# Altium PCB УШЯИ 758727.205-2.PcbDoc (part 1 of 3)
Units mm, origin at the board's own origin, x right, y up, seen from the top; angles counter-clockwise.
Board outline 230 x 150 mm, 2 copper layers (Top Layer, Bottom Layer), stack 1.57 mm thick; 340 components, 190 nets, 1058 pads, 246 vias.
Unrouted connection lines stored in the file: 2.
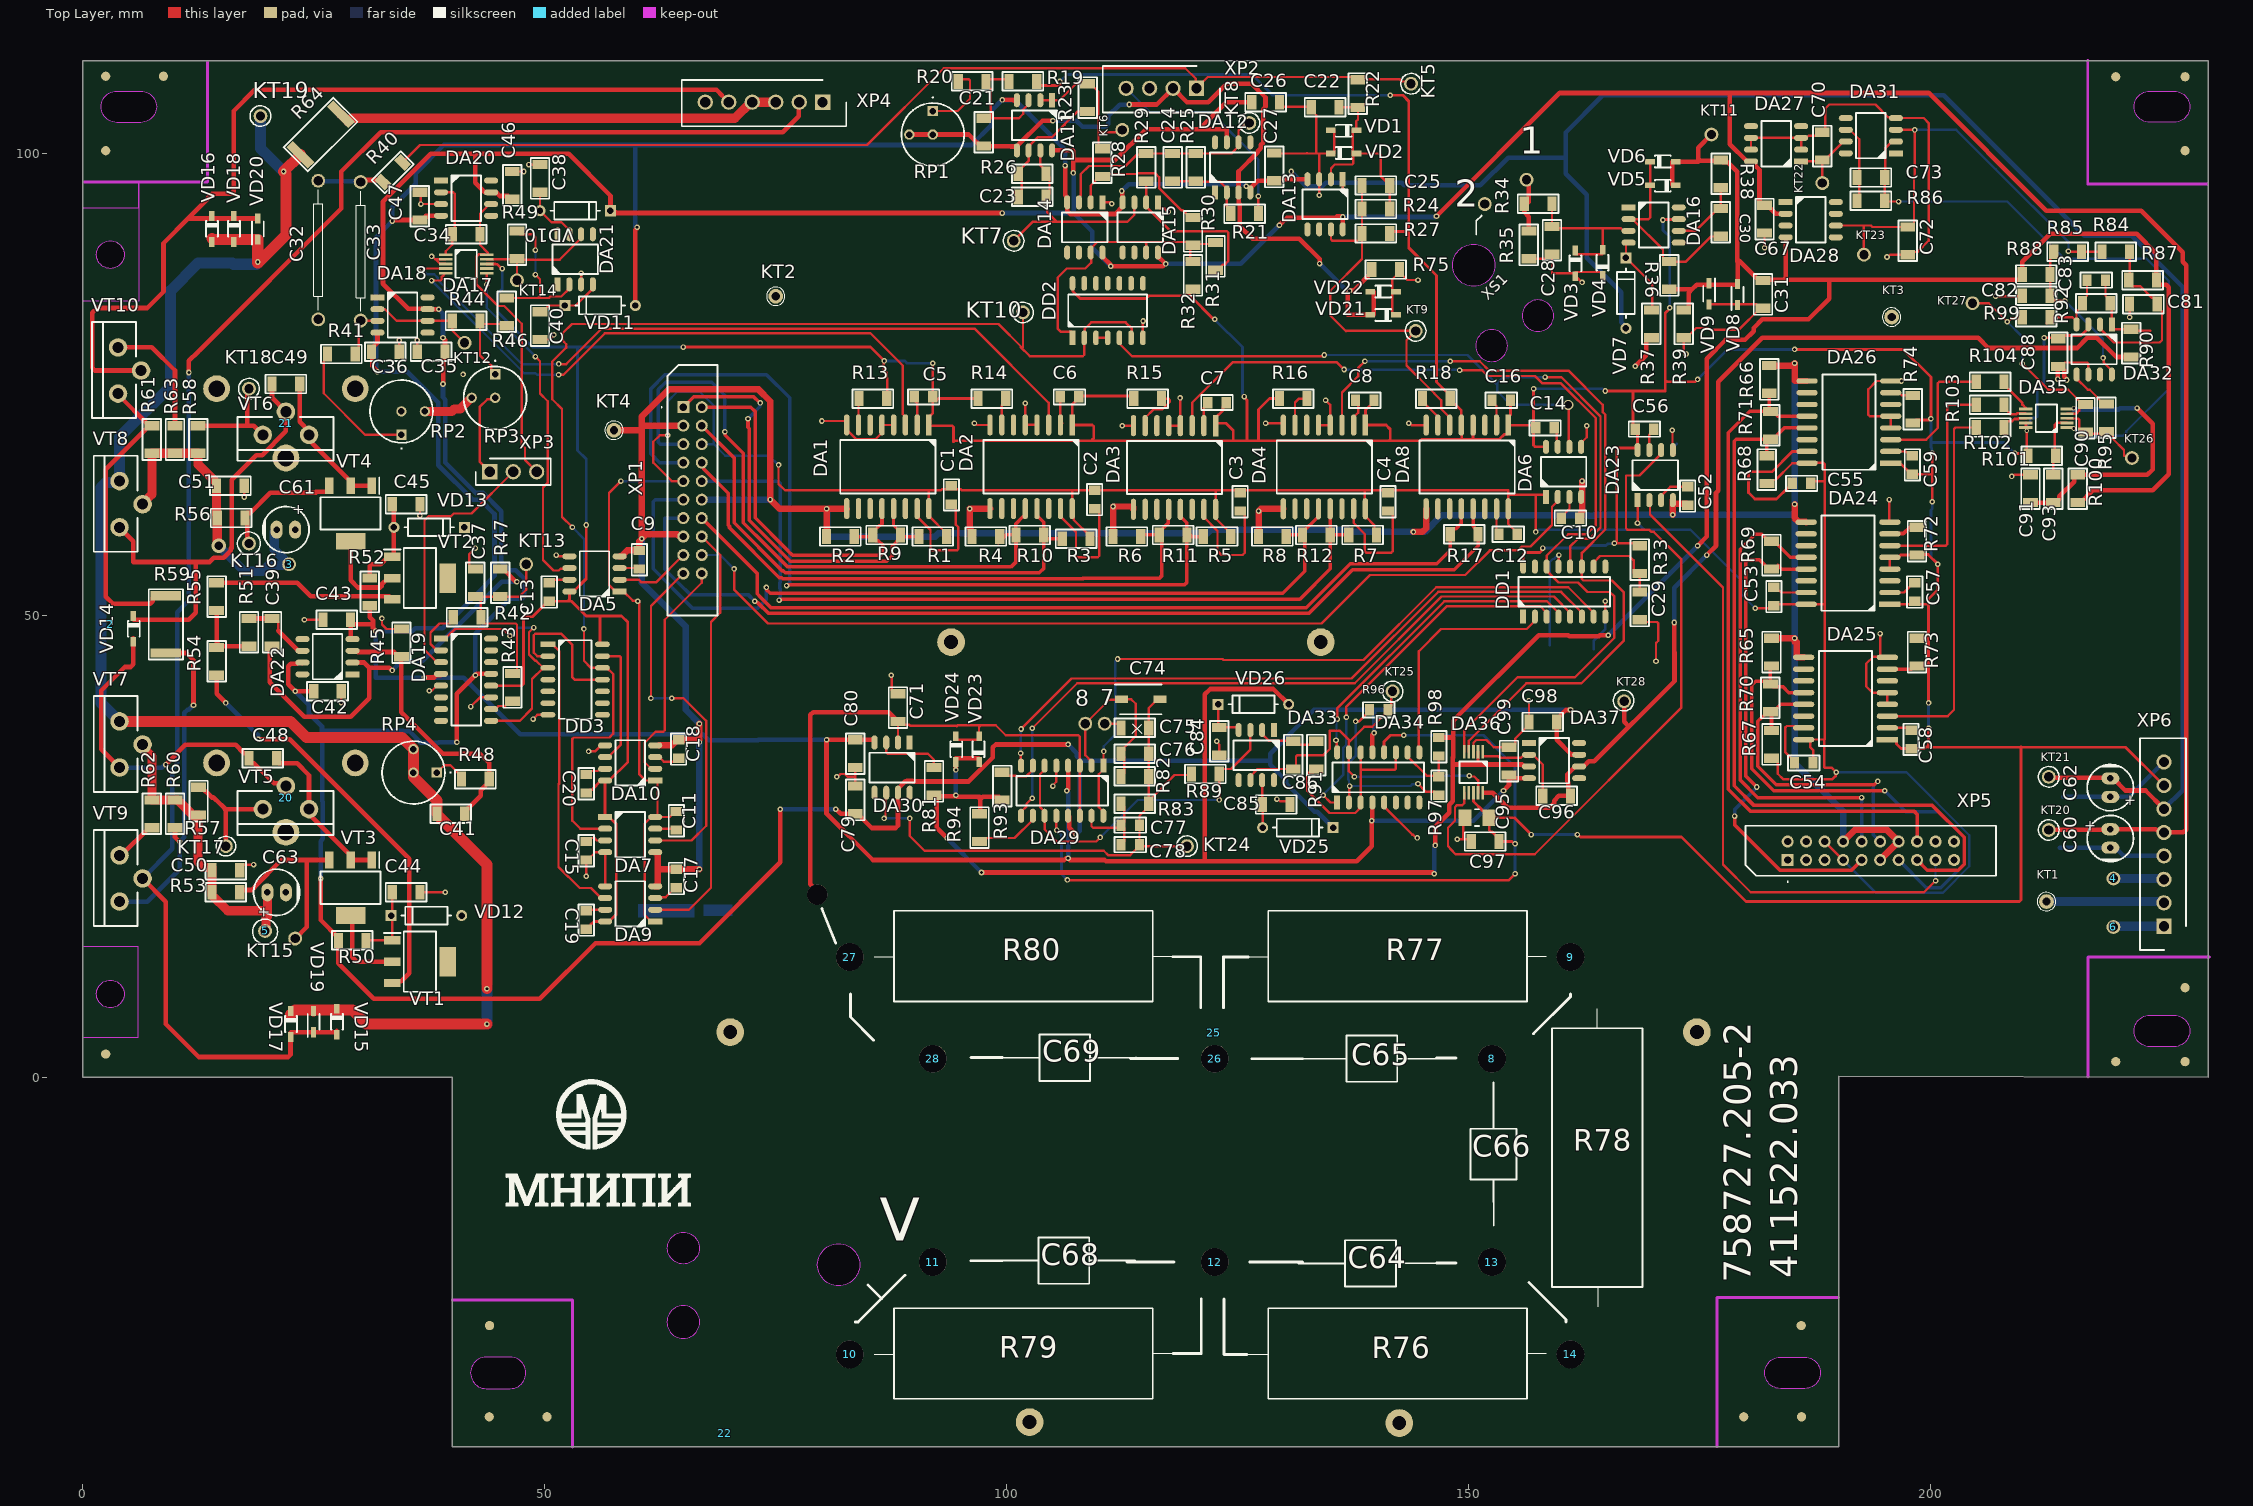
[diagram p0: Top Layer view]
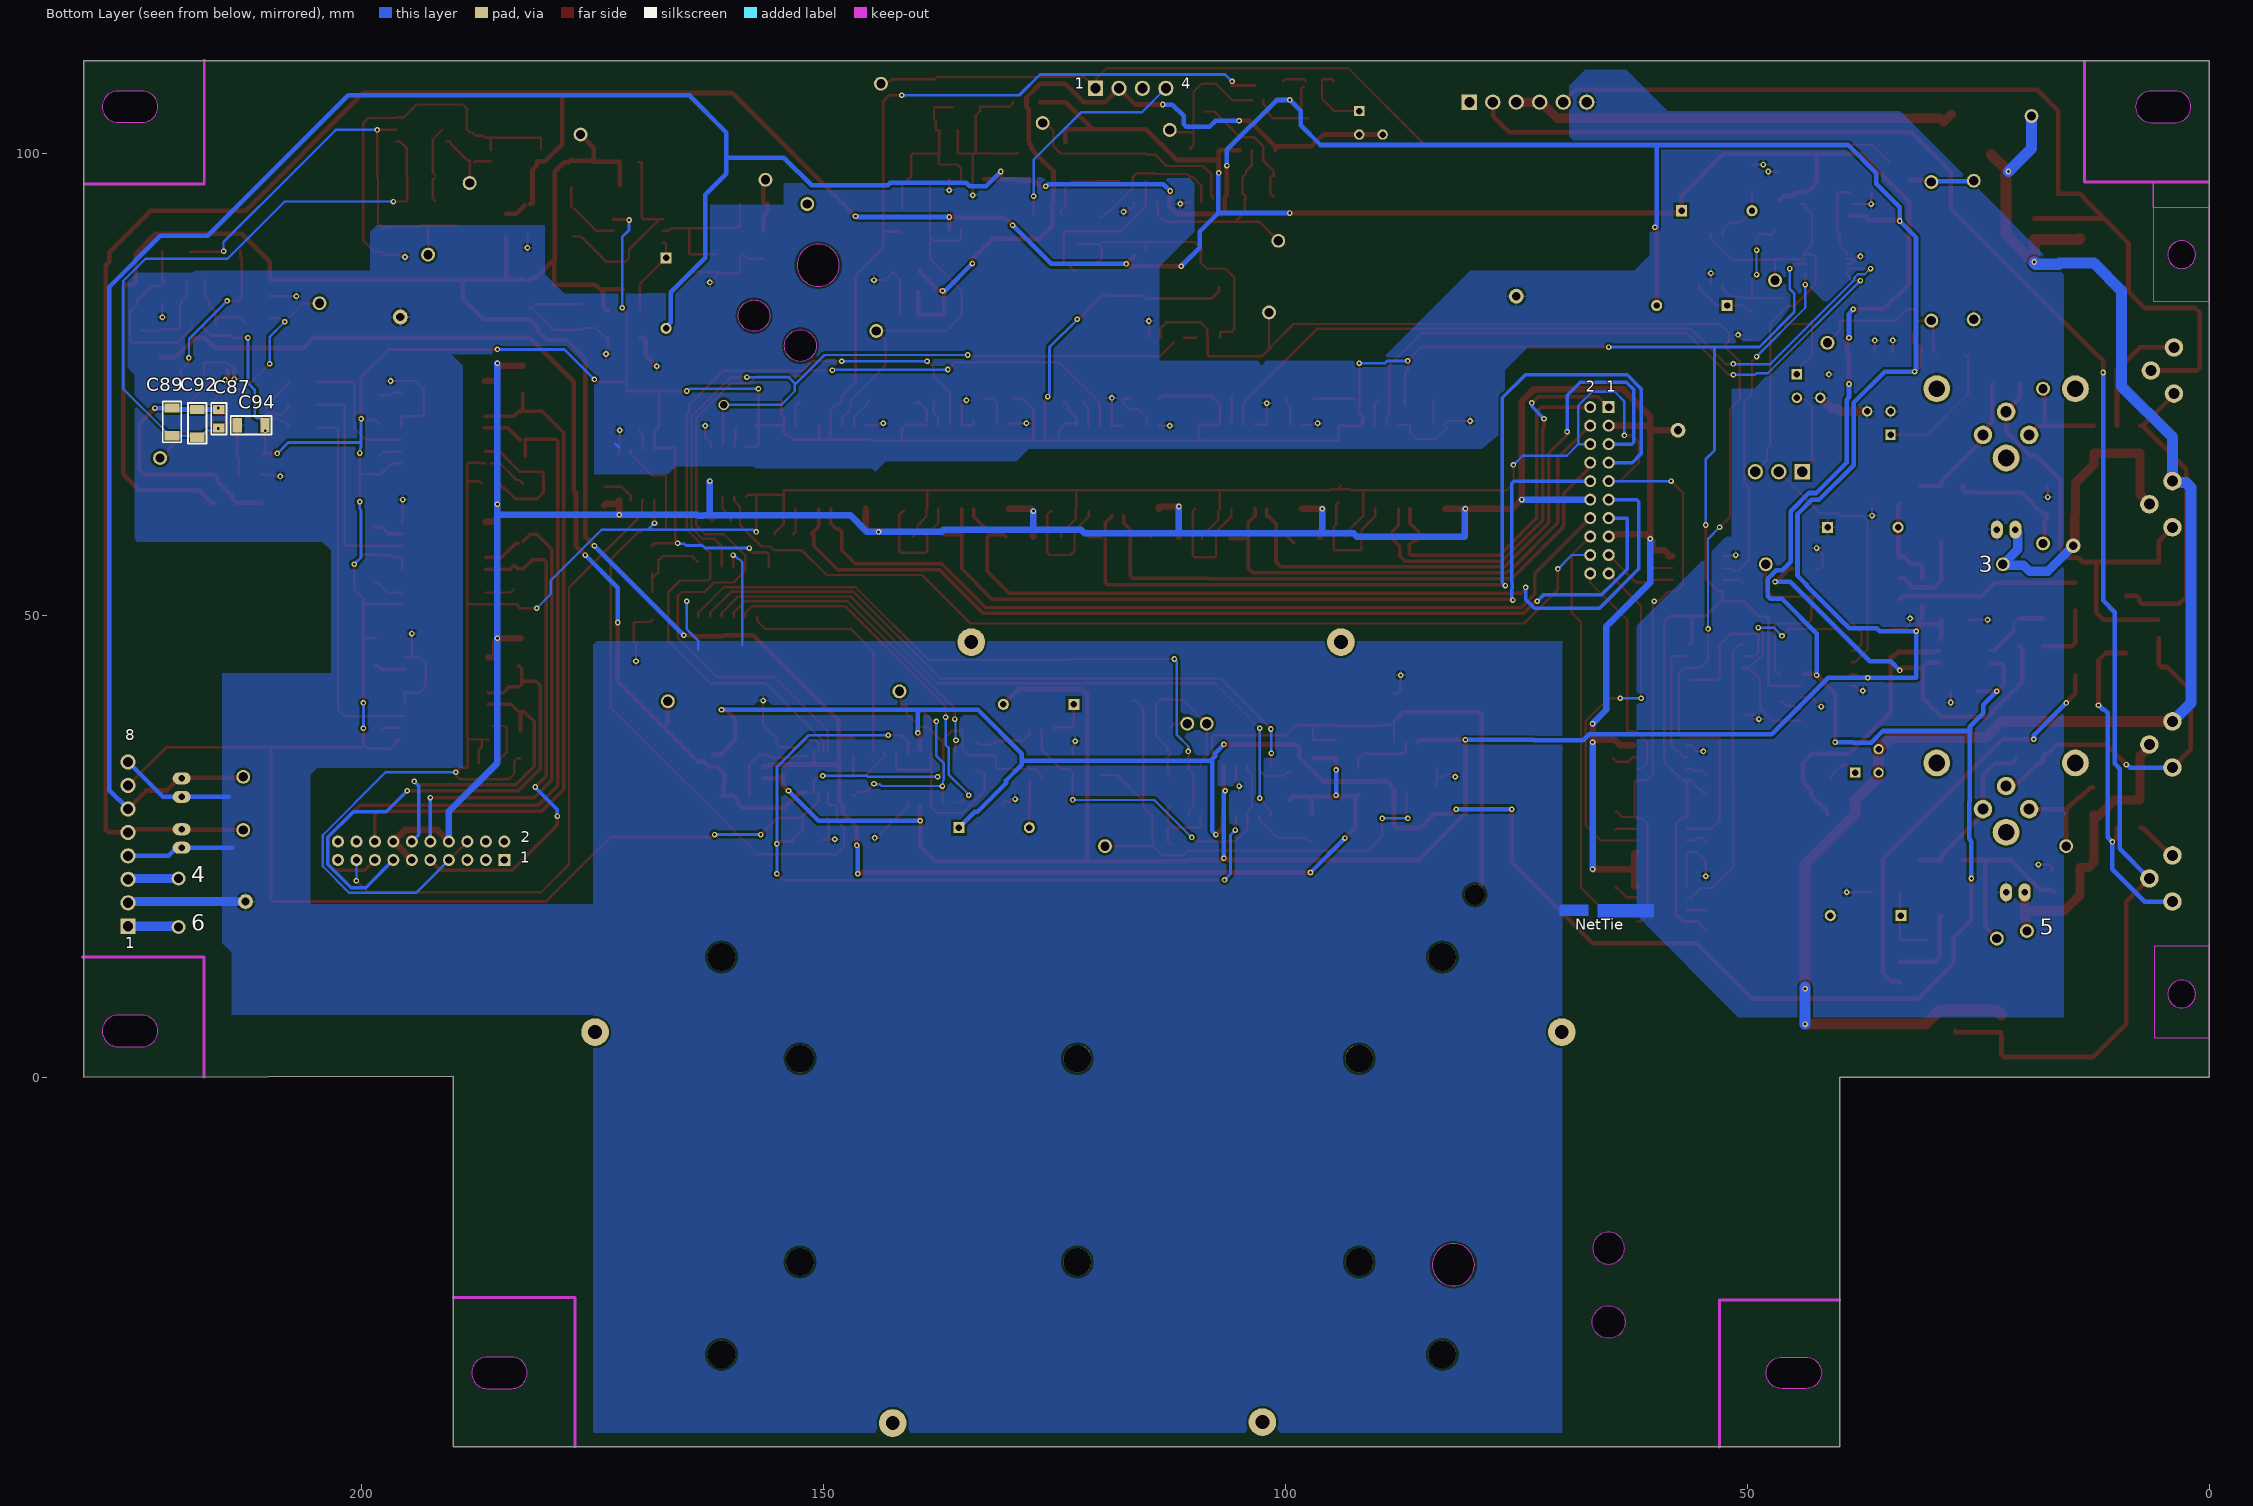
[diagram p1: Bottom Layer view, seen from below]
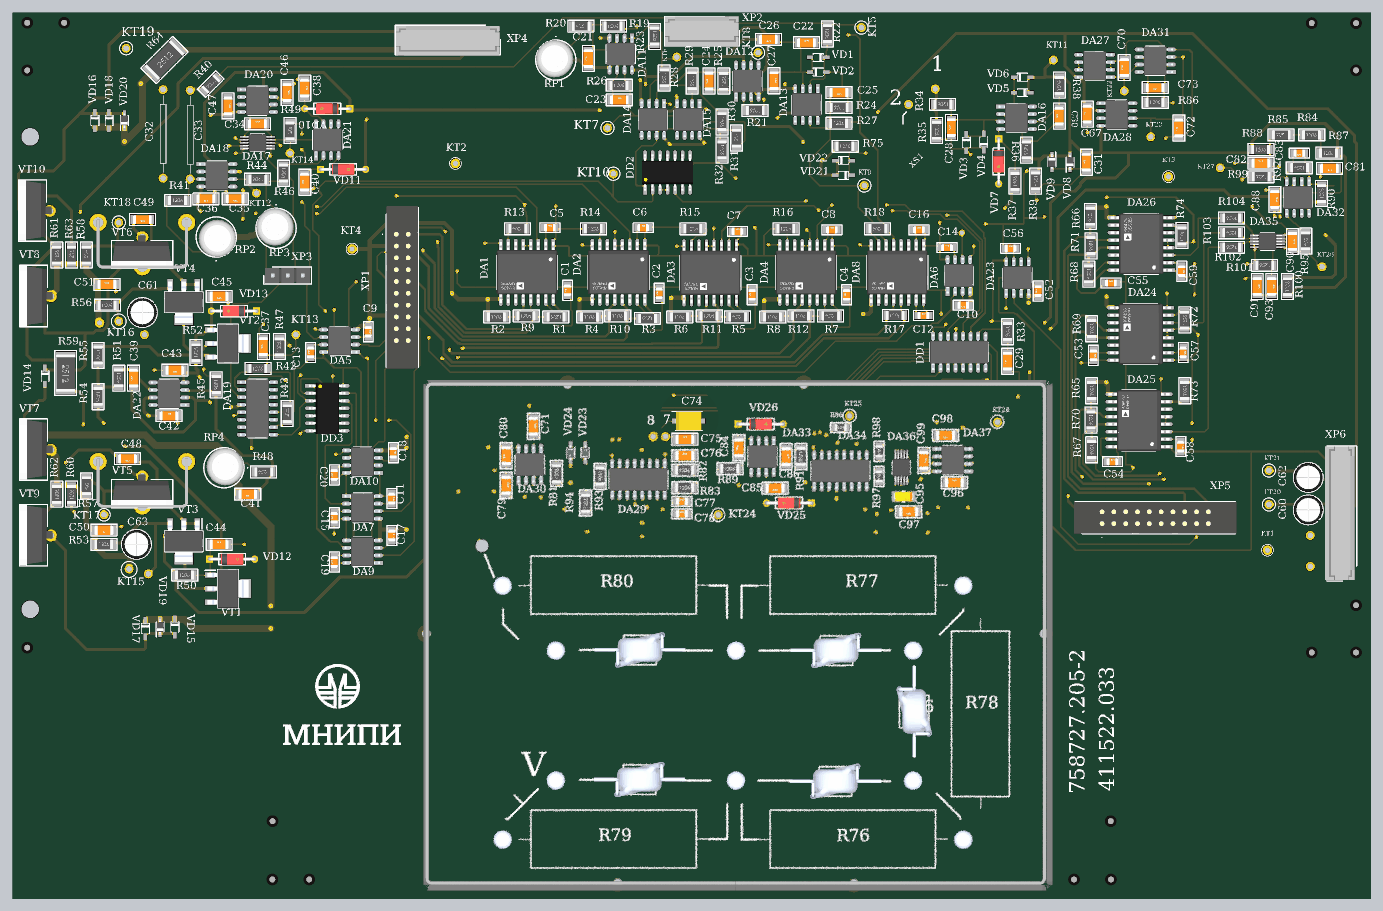
[diagram p4: 3D render of the assembled board from above, using the file's embedded part models]
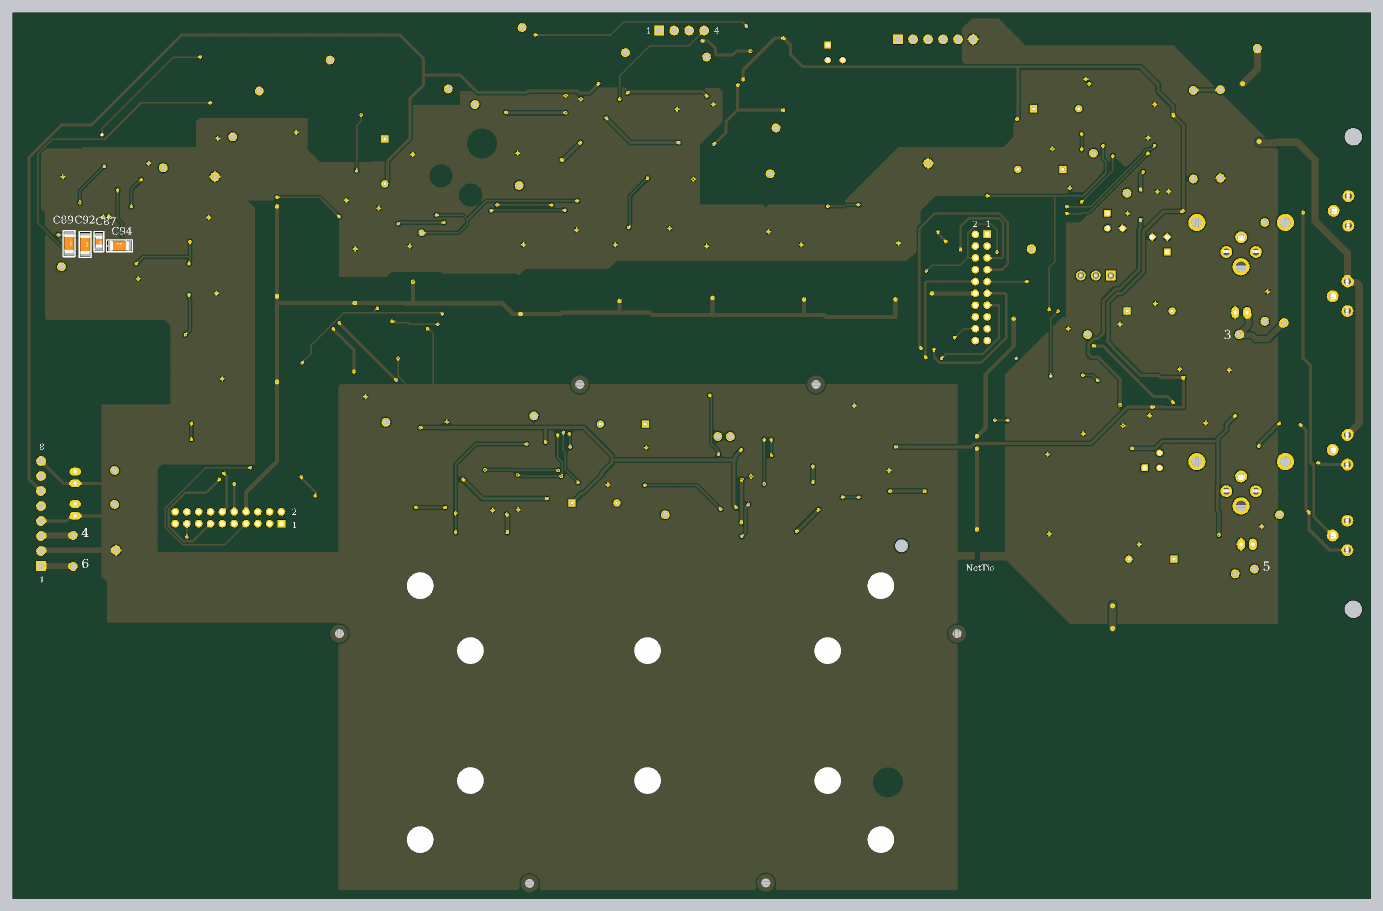
[diagram p5: 3D render of the assembled board from below, using the file's embedded part models]

## Layer stack, top to bottom
Top Solder: solder mask 0.0102, Solder Resist, Dk 3.5
Top Layer: signal copper 0.0356
Dielectric 1: core 1.4986, Core-043, Dk 4.3
Bottom Layer: signal copper 0.0356
Bottom Solder: solder mask 0.0102, Solder Resist, Dk 3.5

## Board outline
0,0 0,110 230,110 230,0 190,0.086 190,-40 40,-40 40,0
cut-out: 4.5,89 cw(c3,89) 3,87.5 cw(c3,89) 1.5,89 cw(c3,89) 3,90.5 cw(c3,89)
cut-out: 6.3,103.3 3.7,103.3 cw(c3.7,105) 3.7,106.7 6.3,106.7 cw(c6.3,105)
cut-out: 4.5,9 cw(c3,9) 3,7.5 cw(c3,9) 1.5,9 cw(c3,9) 3,10.5 cw(c3,9)
cut-out: 226.3,103.309 223.7,103.309 cw(c223.7,105.009) 223.7,106.709 226.3,106.709 cw(c226.3,105.009)
cut-out: 186.327,-33.7 183.727,-33.7 cw(c183.727,-32) 183.727,-30.3 186.327,-30.3 cw(c186.327,-32)
cut-out: 226.3,3.3 223.7,3.3 cw(c223.7,5) 223.7,6.7 226.3,6.7 cw(c226.3,5)
cut-out: 46.273,-33.7 ccw(c46.273,-32) 46.273,-30.3 43.673,-30.3 ccw(c43.673,-32) 43.673,-33.7
cut-out: 79.52,-20.3 cw(c81.8,-20.3) 81.8,-18.02 cw(c81.8,-20.3) 84.08,-20.3 cw(c81.8,-20.3) 81.8,-22.58 cw(c81.8,-20.3)
cut-out: 63.228,-26.5 ccw(c65,-26.5) 65,-28.272 ccw(c65,-26.5) 66.772,-26.5 ccw(c65,-26.5) 65,-24.728 ccw(c65,-26.5)
cut-out: 63.276,-18.5 cw(c65,-18.5) 65,-16.776 cw(c65,-18.5) 66.724,-18.5 cw(c65,-18.5) 65,-20.224 cw(c65,-18.5)
cut-out: 157.475,80.697 ccw(c157.475,82.4) 159.178,82.4 ccw(c157.475,82.4) 157.475,84.103 ccw(c157.475,82.4) 155.772,82.4 ccw(c157.475,82.4)
cut-out: 150.745,79.15 ccw(c152.467,79.15) 152.467,77.428 ccw(c152.467,79.15) 154.189,79.15 ccw(c152.467,79.15) 152.467,80.872 ccw(c152.467,79.15)
cut-out: 148.246,87.864 cw(c150.527,87.864) 150.527,90.144 cw(c150.527,87.864) 152.807,87.864 cw(c150.527,87.864) 150.527,85.584 cw(c150.527,87.864)

## Design rules (kind name [scope] priority, off if disabled: settings)
BoardOutlineClearance Overlay [OnSilkscreen] p1: gap=0.4 ignorepadtopadclearanceinfootprint=FALSE
BoardOutlineClearance "Top Bottom" [OnOutside] p2: gap=0.25 ignorepadtopadclearanceinfootprint=FALSE
BoardOutlineClearance OnCopper [OnCopper] p3: gap=0.5 ignorepadtopadclearanceinfootprint=FALSE
Clearance GeneralClearence [All] p1: gap=0.25 ignorepadtopadclearanceinfootprint=TRUE
Clearance [InNamedPolygon('GND_Under_Defence')] p2: gap=0.5 ignorepadtopadclearanceinfootprint=FALSE
Clearance Clearance_1 [InNamedPolygon('Main_GND')] p3: gap=0.5 ignorepadtopadclearanceinfootprint=FALSE
Clearance PolygonGNDClearence [InNamedPolygon('GND_L01_P000')] p4: gap=0.25 ignorepadtopadclearanceinfootprint=FALSE
Clearance SameDiffPairClearence [All] p5: gap=0.13 ignorepadtopadclearanceinfootprint=TRUE
DiffPairsRouting [InDifferentialPair ('DAT_DA1_DIFF') Or InDifferentialPair ('DAT_RgDU_DIFF') Or InDifferentialPair ('CLK_RgDU_DIFF') Or InDifferentialPair ('CLK_DA1_DIFF') Or InDifferentialPair ('LINE_DIFF') Or InDifferentialPair ('CLK_ADU_DIFF') Or InDifferentialPair ('DAT_ADU_DIFF') Or InDifferentialPair ('RUN_ADU_DIFF')] p1: maxlimit=0.254 minlimit=0.254 mostfreqgap=0.254 toplayer_minwidth=0.381 toplayer_maxwidth=0.381 toplayer_prefwidth=0.381 bottomlayer_minwidth=0.381 bottomlayer_maxwidth=0.381 bottomlayer_prefwidth=0.381 maxuncoupledlength=12.7
DiffPairsRouting D100 [All] p2: maxlimit=0.127 minlimit=0.127 mostfreqgap=0.127 toplayer_minwidth=0.318 toplayer_maxwidth=0.318 toplayer_prefwidth=0.318 bottomlayer_minwidth=0.318 bottomlayer_maxwidth=0.318 bottomlayer_prefwidth=0.318 impedanceprofiledriven=TRUE impedanceprofileid={875D3F18-1F62-4128-BB32-B43A7001EA07} impedanceprofilevalue=100.000000 maxuncoupledlength=12.7
MatchedLengths [InDifferentialPair ('DAT_DA1_DIFF') Or InDifferentialPair ('DAT_RgDU_DIFF') Or InDifferentialPair ('CLK_RgDU_DIFF') Or InDifferentialPair ('CLK_DA1_DIFF') Or InDifferentialPair ('LINE_DIFF') Or InDifferentialPair ('CLK_ADU_DIFF') Or InDifferentialPair ('DAT_ADU_DIFF') Or InDifferentialPair ('RUN_ADU_DIFF')] p1: tolerance=25.4 checknetsindiffpair=FALSE checkdiffpairvsdiffpair=TRUE checkxsignals=TRUE checkothers=TRUE
PolygonConnect PolygonConnect_2 [All vs IsNamedPolygon('Main_GND')] p1: connectstyle=Relief reliefconductorwidth=0.254 reliefentries=4 polygonreliefangle="90 Angle" airgapwidth=0.254
PolygonConnect PolygonConnect_1 [All vs IsNamedPolygon('GND_Under_Defence')] p2: connectstyle=Relief reliefconductorwidth=0.254 reliefentries=4 polygonreliefangle="90 Angle" airgapwidth=0.254
PolygonConnect [All] p3: connectstyle=Relief reliefconductorwidth=0.254 reliefentries=4 polygonreliefangle="90 Angle" airgapwidth=0.3
RoutingVias [All] p1: holewidth=0.3 width=0.6 viastyle="Through Hole" minholewidth=0.3 minwidth=0.6 maxholewidth=0.3 maxwidth=0.6
SolderMaskExpansion [All] p1: expansion=0.102 istentingtop=FALSE
SupplyNets "Schematic Supply Nets_54" [InNet('OVLW')] p1: voltage=0.000
SupplyNets "Schematic Supply Nets_53" [InNet('ENB_RgF')] p2: voltage=0.000
SupplyNets "Schematic Supply Nets_52" [InNet('CLK_RgDU-')] p3: voltage=0.000
SupplyNets "Schematic Supply Nets_51" [InNet('CLK_RgDU')] p4: voltage=0.000
SupplyNets "Schematic Supply Nets_50" [InNet('INF')] p5: voltage=0.000
SupplyNets "Schematic Supply Nets_49" [InNet('DAT_RgDU+')] p6: voltage=0.000
SupplyNets "Schematic Supply Nets_48" [InNet('CLK_ADU+')] p7: voltage=0.000
SupplyNets "Schematic Supply Nets_47" [InNet('CLK_RgDU+')] p8: voltage=0.000
SupplyNets "Schematic Supply Nets_46" [InNet('DAT_ADU+')] p9: voltage=0.000
SupplyNets "Schematic Supply Nets_45" [InNet('ENB_RgFn')] p10: voltage=0.000
SupplyNets "Schematic Supply Nets_44" [InNet('ENB_DA1n')] p11: voltage=0.000
SupplyNets "Schematic Supply Nets_43" [InNet('ENSn')] p12: voltage=0.000
SupplyNets "Schematic Supply Nets_42" [InNet('LINE-')] p13: voltage=0.000
SupplyNets "Schematic Supply Nets_41" [InNet('ENB_DU')] p14: voltage=0.000
SupplyNets "Schematic Supply Nets_40" [InNet('CLK_DA1+')] p15: voltage=0.000
SupplyNets "Schematic Supply Nets_39" [InNet('CLK_DA1-')] p16: voltage=0.000
SupplyNets "Schematic Supply Nets_38" [InNet('LIMIT')] p17: voltage=0.000
SupplyNets "Schematic Supply Nets_37" [InNet('CLK_ADU')] p18: voltage=0.000
SupplyNets "Schematic Supply Nets_36" [InNet('LIMITn')] p19: voltage=0.000
SupplyNets "Schematic Supply Nets_35" [InNet('LINE+')] p20: voltage=0.000
SupplyNets "Schematic Supply Nets_34" [InNet('RUN_ADU')] p21: voltage=0.000
SupplyNets "Schematic Supply Nets_33" [InNet('CLK_ADU-')] p22: voltage=0.000
SupplyNets "Schematic Supply Nets_32" [InNet('DAT_DA1+')] p23: voltage=0.000
SupplyNets "Schematic Supply Nets_31" [InNet('ENS')] p24: voltage=0.000
SupplyNets "Schematic Supply Nets_30" [InNet('CLK_DA1')] p25: voltage=0.000
SupplyNets "Schematic Supply Nets_29" [InNet('RUN_ADU+')] p26: voltage=0.000
SupplyNets "Schematic Supply Nets_28" [InNet('RUN_ADU-')] p27: voltage=0.000
SupplyNets "Schematic Supply Nets_27" [InNet('ENB_DA1')] p28: voltage=0.000
SupplyNets "Schematic Supply Nets_26" [InNet('DAT_RgDU')] p29: voltage=0.000
SupplyNets "Schematic Supply Nets_18" [InNet('DAT_RgDU-')] p30: voltage=0.000
SupplyNets "Schematic Supply Nets_11" [InNet('DAT_DA1-')] p31: voltage=0.000
SupplyNets "Schematic Supply Nets_9" [InNet('DAT_DA1')] p32: voltage=0.000
SupplyNets "Schematic Supply Nets_8" [InNet('DAT_ADU')] p33: voltage=0.000
SupplyNets "Schematic Supply Nets_6" [InNet('DAT_ADU-')] p34: voltage=0.000
SupplyNets "Schematic Supply Nets_3" [InNet('ENB_DUn')] p35: voltage=0.000
SupplyNets "Schematic Supply Nets_1" [InNet('LINE')] p36: voltage=0.000
SupplyNets "Schematic Supply Nets_25" [InNet('+55V')] p37: voltage=0.000
SupplyNets "Schematic Supply Nets_24" [InNet('-55V')] p38: voltage=0.000
SupplyNets "Schematic Supply Nets_23" [InNet('+15V')] p39: voltage=0.000
SupplyNets "Schematic Supply Nets_22" [InNet('-15V')] p40: voltage=0.000
SupplyNets "Schematic Supply Nets_21" [InNet('+3.3Vn')] p41: voltage=0.000
SupplyNets "Schematic Supply Nets_10" [InNet('+5V')] p42: voltage=0.000
SupplyNets "Schematic Supply Nets_20" [InNet('OVLWn')] p43: voltage=0.000
SupplyNets "Schematic Supply Nets_19" [InNet('0V')] p44: voltage=0.000
SupplyNets "Schematic Supply Nets_17" [InNet('GNDN')] p45: voltage=0.000
SupplyNets "Schematic Supply Nets_16" [InNet('ADC')] p46: voltage=0.000
SupplyNets "Schematic Supply Nets_15" [InNet('F5')] p47: voltage=0.000
SupplyNets "Schematic Supply Nets_14" [InNet('F3')] p48: voltage=0.000
SupplyNets "Schematic Supply Nets_13" [InNet('GN')] p49: voltage=0.000
SupplyNets "Schematic Supply Nets_12" [InNet('F7')] p50: voltage=0.000
SupplyNets "Schematic Supply Nets_7" [InNet('GND')] p51: voltage=0.000
SupplyNets "Schematic Supply Nets_5" [InNet('F6')] p52: voltage=0.000
SupplyNets "Schematic Supply Nets_4" [InNet('F4')] p53: voltage=0.000
SupplyNets "Schematic Supply Nets_2" [InNet('F2')] p54: voltage=0.000
SupplyNets "Schematic Supply Nets" [InNet('GNDZ')] p55: voltage=0.000
Width +55 [InNet('+55')] p1: maxlimit=1 minlimit=1 preferedwidth=1
Width -55 [InNet('-55')] p2: maxlimit=1 minlimit=1 preferedwidth=1
Width S100 [(InDifferentialPairClass('All Differential Pairs'))] p3: maxlimit=0.601 minlimit=0.601 preferedwidth=0.601 impedanceprofiledriven=TRUE impedanceprofileid={944AE4BE-EFAD-4184-B497-121AE9CA9668} impedanceprofilevalue=100.000000 minimp=50.000000 maximp=50.000000 favimp=50.000000
Width +5 [InNet('+5')] p4: maxlimit=0.3 minlimit=0.3 preferedwidth=0.3
Width +15 [InNet('+15')] p5: maxlimit=0.5 minlimit=0.5 preferedwidth=0.5
Width -15 [InNet('-15')] p6: maxlimit=0.5 minlimit=0.5 preferedwidth=0.5
Width General [All] p7: maxlimit=1.2 minlimit=0.25 preferedwidth=0.25
29 further rules are at their usual default settings.

## Classes and differential pairs
component class УШЯИ.411522.033Э3_2: 1 2 20 C21 C22 C23 C24 C25 C26 C27 C28 C29 C30 C31 Comment DA11 DA12 DA13 DA14 DA15 DA16 DD1 DD2 KT5 KT6 KT7 KT8 KT9 KT10 KT11 R19 R20 R21 R22 R23 R24 R25 R26 R27 R28 R29 R30 R31 R32 R33 R34 R35 R36 R37 R38 R39 RP1 VD1 VD2 VD3 VD4 VD5 VD6 VD7 VD8 VD9 XP2
component class УШЯИ.411522.033Э3_4: 3 4 5 6 22 25 C52 C53 C54 C55 C56 C59 C60 C61 C62 C63 DA23 DA24 DA25 DA26 KT20 KT21 R65 R66 R67 R68 R69 R70 R71 R72 R73 R74 R75 VD21 VD22 XP5 XP6
component class УШЯИ.411522.033Э3_1: C1 C2 C3 C4 C5 C6 C7 C8 C9 C10 C11 C12 C13 C14 C15 C16 C17 C18 C19 C20 DA1 DA2 DA3 DA4 DA5 DA6 DA7 DA8 DA9 DA10 KT1 KT2 KT3 KT4 R1 R2 R3 R4 R5 R6 R7 R8 R9 R10 R11 R12 R13 R14 R15 R16 R17 R18 XP1
component class УШЯИ.411522.033Э3_3: C32 C33 C34 C35 C36 C37 C38 C39 C40 C41 C42 C43 C44 C45 C46 C47 C48 C49 C50 C51 DA17 DA18 DA19 DA20 DA21 DA22 DD3 KT12 KT13 KT14 KT15 KT16 KT17 KT18 KT19 R40 R41 R42 R43 R44 R45 R46 R47 R48 R49 R50 R51 R52 R53 R54 R55 R56 R57 R58 R59 R60 R61 R62 R63 R64 RP2 RP3 RP4 VD10 VD11 VD12 VD13 VD14 VD15 VD16 VD17 VD18 VD19 VD20 VT1 VT2 VT3 VT4 VT5 VT6 VT7 VT8 VT9 VT10 XP3 XP4
component class УШЯИ.411522.033Э3_5: 7 8 C64 C65 C66 C67 C68 C69 C70 C71 C72 C73 C74 C75 C76 C77 C78 C79 C80 C81 C82 C83 C84 C85 C86 C87 C88 C89 C90 C91 C92 C93 C94 C95 C96 C97 C98 C99 DA27 DA28 DA29 DA30 DA31 DA32 DA33 DA34 DA35 DA36 DA37 KT22 KT23 KT24 KT25 KT26 KT27 KT28 R76 R77 R78 R79 R80 R81 R82 R83 R84 R85 R86 R87 R88 R89 R90 R91 R92 R93 R94 R95 R97 R99 R101 R103 R104 VD23 VD24 VD25 VD26 XS3

## Components (designator, comment, footprint, x,y, rotation, side; value= is the part's Value field where it differs from the comment)
1 "OTV10" OTV10 156.25,97.109 r180 top
2 "Comment" "Радиатор 752699.062" 3,9 r0 top
2 "OTV10" OTV10 151.725,94.475 r180 top
3 "OTV10" OTV10 22.35,55.5 r90 top
4 "OTV10" OTV10 219.75,21.5 r90 top
5 "OTV10" OTV10 19.75,15.82 r90 top
6 "OTV10" OTV10 219.75,16.25 r90 top
7 "OTV10" OTV10 110.595,38.251 r0 top
8 "Comment" "Стойка 301421.021" 152.5,2 r180 top
8 "OTV10" OTV10 108.5,38.251 r0 top
9 "Comment" "Стойка 301421.021" 161,13 r180 top
10 "Comment" "Стойка 301421.021" 83,-30 r180 top
11 "Comment" "Стойка 301421.021" 92,-20 r180 top
12 "Comment" "Стойка 301421.021" 122.5,-20 r180 top
13 "Comment" "Стойка 301421.021" 152.5,-20 r180 top
14 "Comment" "Стойка 301421.021" 161,-30 r180 top
20 "Comment" "Стойка 745512.303" 22,31.5 r180 top
21 "Comment" "Стойка 745512.303" 22,72 r180 top
22 "Comment" "Крышка 745512.799" 69.5,-38.55 r0 top locked
25 "Comment" Экран1 70.075,-37.825 r0 top locked
26 "Comment" "Стойка 301421.021" 122.5,2 r180 top
27 "Comment" "Стойка 301421.021" 83,13 r180 top
28 "Comment" "Стойка 301421.021" 92,2 r180 top
C1 "0805-X7R-25 В-0,1 мкФ +-10%" "CAP: 0805" 94,63 r90 top value="0,1 мкФ"
C2 "0805-X7R-25 В-0,1 мкФ +-10%" "CAP: 0805" 109.5,62.5 r90 top value="0,1 мкФ"
C3 "0805-X7R-25 В-0,1 мкФ +-10%" "CAP: 0805" 125.25,62.25 r90 top value="0,1 мкФ"
C4 "0805-X7R-25 В-0,1 мкФ +-10%" "CAP: 0805" 141.25,62.25 r90 top value="0,1 мкФ"
C5 "0805-X7R-25 В-0,1 мкФ +-10%" "CAP: 0805" 91,73.602 r0 top value="0,1 мкФ"
C6 "0805-X7R-25 В-0,1 мкФ +-10%" "CAP: 0805" 106.791,73.602 r0 top value="0,1 мкФ"
C7 "0805-X7R-25 В-0,1 мкФ +-10%" "CAP: 0805" 122.75,73 r0 top value="0,1 мкФ"
C8 "0805-X7R-25 В-0,1 мкФ +-10%" "CAP: 0805" 138.75,73.25 r0 top value="0,1 мкФ"
C9 "0805-X7R-25 В-0,1 мкФ +-10%" "CAP: 0805" 60.25,56 r270 top value="0,1 мкФ"
C10 "0805-X7R-25 В-0,1 мкФ +-10%" "CAP: 0805" 161,60.5 r180 top value="0,1 мкФ"
C11 "0805-X7R-25 В-0,1 мкФ +-10%" "CAP: 0805" 64.25,27.75 r270 top value="0,1 мкФ"
C12 "0805-X7R-25 В-0,1 мкФ +-10%" "CAP: 0805" 154.25,58.75 r0 top value="0,1 мкФ"
C13 "0805-X7R-25 В-0,1 мкФ +-10%" "CAP: 0805" 50.5,52.5 r90 top value="0,1 мкФ"
C14 "0805-X7R-25 В-0,1 мкФ +-10%" "CAP: 0805" 158.25,70.25 r0 top value="0,1 мкФ"
C15 "0805-X7R-25 В-0,1 мкФ +-10%" "CAP: 0805" 54.5,24.5 r90 top value="0,1 мкФ"
C16 "0805-X7R-25 В-0,1 мкФ +-10%" "CAP: 0805" 153.5,73.25 r0 top value="0,1 мкФ"
C17 "0805-X7R-25 В-0,1 мкФ +-10%" "CAP: 0805" 64.25,21.5 r270 top value="0,1 мкФ"
C18 "0805-X7R-25 В-0,1 мкФ +-10%" "CAP: 0805" 64.5,35.5 r270 top value="0,1 мкФ"
C19 "0805-X7R-25 В-0,1 мкФ +-10%" "CAP: 0805" 54.5,17 r90 top value="0,1 мкФ"
C20 "0805-X7R-25 В-0,1 мкФ +-10%" "CAP: 0805" 54.5,31.75 r90 top value="0,1 мкФ"
C21 "1206-X7R-50 B-0,01 мкФ+-10%" "CAP: 1206" 97.5,102.25 r90 top value="0,01 мкФ"
C22 "1206-X7R-50 B-1 нФ+-10%" "CAP: 1206" 134.446,104.948 r0 top value="1 нФ"
C23 "1206-X7R-50 B-5600 пФ+-10%" "CAP: 1206" 102.75,95.25 r0 top value="5600 пФ"
C24 "1206-X7R-50 B-510 пФ+-10%" "CAP: 1206" 117.946,98.448 r90 top value="510 пФ"
C25 "1206-X7R-50 B-51 пФ+-10%" "CAP: 1206" 139.946,96.493 r180 top value="51 пФ"
C26 "1206-X7R-50 B-0,33 мкФ+-10%" "CAP: 1206" 128,105.5 r180 top value="0,33 мкФ"
C27 "1206-X7R-50 B-0,33 мкФ+-10%" "CAP: 1206" 128.946,98.5 r270 top value="0,33 мкФ"
C28 "1206-X7R-50 B-100 пФ+-10%" "CAP: 1206" 159,90.558 r90 top value="100 пФ"
C29 "1206-X7R-50 B-0,33 мкФ+-10%" "CAP: 1206" 168.5,51 r90 top value="0,33 мкФ"
C30 "1206-X7R-50 B-240 пФ+-10%" "CAP: 1206" 177.25,92.5 r90 top value="240 пФ"
C31 "1206-X7R-50 B-100 пФ+-10%" "CAP: 1206" 181.836,84.7 r90 top value="100 пФ"
C32 "К73-17-63 В-0,47 мкФ +-5%" К73-17-A15 25.5,82 r90 top
C33 "К73-17-63 В-0,47 мкФ +-5%" К73-17-A15 30.086,81.865 r90 top
C34 "1206-X7R-50 B-33 пФ+-10%" "CAP: 1206" 41.5,91.206 r0 top value="33 пФ"
C35 "1206-X7R-50 B-0,33 мкФ+-10%" "CAP: 1206" 37.712,78.5 r180 top value="0,33 мкФ"
C36 "1206-X7R-50 B-0,33 мкФ+-10%" "CAP: 1206" 32.754,78.5 r180 top value="0,33 мкФ"
C37 "1206-X7R-50 B-39 нФ+-10%" "CAP: 1206" 42.5,53.5 r90 top value="39 нФ"
C38 "1206-X7R-50 B-0,33 мкФ+-10%" "CAP: 1206" 49.495,97.245 r270 top value="0,33 мкФ"
C39 "1206-X7R-50 B-100 пФ+-10%" "CAP: 1206" 20.5,48.135 r90 top value="100 пФ"
C40 "1206-X7R-50 B-0,33 мкФ+-10%" "CAP: 1206" 49.5,81.32 r90 top value="0,33 мкФ"
C41 "1206-X7R-50 B-100 пФ+-10%" "CAP: 1206" 39.84,28.5 r180 top value="100 пФ"
C42 "1206-X7R-50 B-0,33 мкФ+-10%" "CAP: 1206" 26.5,41.77 r0 top value="0,33 мкФ"
C43 "1206-X7R-50 B-0,33 мкФ+-10%" "CAP: 1206" 27.5,49.5 r180 top value="0,33 мкФ"
C44 "1206-X7R-50 B-0,33 мкФ+-10%" "CAP: 1206" 35,20 r0 top value="0,33 мкФ"
C45 "1206-X7R-50 B-0,33 мкФ+-10%" "CAP: 1206" 35,62 r180 top value="0,33 мкФ"
C46 "1206-X7R-50 B-0,33 мкФ+-10%" "CAP: 1206" 46.5,96.5 r270 top value="0,33 мкФ"
C47 "1206-X7R-50 B-0,33 мкФ+-10%" "CAP: 1206" 36.5,94.245 r270 top value="0,33 мкФ"
C48 "1206-X7R-50 B-150 пФ+-10%" "CAP: 1206" 19.5,34.5 r180 top value="150 пФ"
C49 "1206-X7R-50 B-150 пФ+-10%" "CAP: 1206" 22,75 r180 top value="150 пФ"
C50 "1206-X7R-50 B-68 нФ+-10%" "CAP: 1206" 15.5,22.4 r180 top value="68 нФ"
C51 "1206-X7R-50 B-68 нФ+-10%" "CAP: 1206" 16,64 r0 top value="68 нФ"
C52 "0805-X7R-25 В-0,1 мкФ +-10%" "CAP: 0805" 173.668,62.875 r90 top value="0,1 мкФ"
C53 "0805-X7R-25 В-0,1 мкФ +-10%" "CAP: 0805" 183,52 r270 top value="0,1 мкФ"
C54 "0805-X7R-25 В-0,1 мкФ +-10%" "CAP: 0805" 186.25,34 r0 top value="0,1 мкФ"
C55 "0805-X7R-25 В-0,1 мкФ +-10%" "CAP: 0805" 186,64.25 r0 top value="0,1 мкФ"
C56 "0805-X7R-25 В-0,1 мкФ +-10%" "CAP: 0805" 169,70.125 r0 top value="0,1 мкФ"
C57 "0805-X7R-25 В-0,1 мкФ +-10%" "CAP: 0805" 198.25,52.5 r270 top value="0,1 мкФ" (schematic designator C59)
C58 "0805-X7R-25 В-0,1 мкФ +-10%" "CAP: 0805" 197.85,36.55 r270 top value="0,1 мкФ"
C59 "0805-X7R-25 В-0,1 мкФ +-10%" "CAP: 0805" 198,66.25 r270 top value="0,1 мкФ" (schematic designator C58)
C60 "ECR-35В-4,7 мкФ" "CAP TH ALUM ELEC D5.00mm S2.00mm H11.00mm" 219.415,25.827 r90 top value="4,7 мкФ"
C61 "ECR-100В-2,2 мкФ" "CAP TH ALUM ELEC D5.00mm S2.00mm H11.00mm" 22,59.25 r0 top value="2,2 мкФ"
C62 "ECR-35В-4,7 мкФ" "CAP TH ALUM ELEC D5.00mm S2.00mm H11.00mm" 219.415,31.327 r270 top value="4,7 мкФ"
C63 "ECR-100В-2,2 мкФ" "CAP TH ALUM ELEC D5.00mm S2.00mm H11.00mm" 21,20 r180 top value="2,2 мкФ"
C64 "CC45SL3JD470JYGNA" CC45S 139.325,-20.125 r180 top value=47pF
C65 "CC45SL3JD470JYGNA" CC45S 139.475,2.025 r180 top value=47pF
C66 "CC45SL3JD470JYGNA" CC45S 152.7,-8.3 r90 top value=47pF
C67 "1206-X7R-50 B-0,33 мкФ+-10%" "CAP: 1206" 182,92.845 r90 top value="0,33 мкФ"
C68 "CC45SL3JD470JYGNA" CC45S 106.15,-19.825 r180 top value=47pF
C69 "CC45SL3JD470JYGNA" CC45S 106.25,2.125 r180 top value=47pF
C70 "1206-X7R-50 B-0,1 мкФ+-10%" "CAP: 1206" 188.25,100.75 r90 top value="0,1 мкФ"
C71 "1206-X7R-50 B-120 пФ+-10%" "CAP: 1206" 88.23,40 r270 top value="120 пФ"
C72 "1206-X7R-50 B-0,1 мкФ+-10%" "CAP: 1206" 197.5,90.5 r90 top value="0,1 мкФ"
C73 "1206-X7R-50 B-1 нФ+-10%" "CAP: 1206" 193.5,97.345 r180 top value="1 нФ"
C74 "TZC3P200A110" TZC3 114.5,40.875 r0 top
C75 "1206-NP0-50 B-10 пФ+-5%" "CAP: 1206" 113.858,37.796 r0 top value="10 пФ"
C76 "1206-X7R-50 B-22 пФ+-10%" "CAP: 1206" 113.858,35 r0 top value="22 пФ"
C77 "0805-NP0-50 В-2200 пФ +-1%" "CAP: 0805" 113.358,27.267 r0 top value="2200 пФ"
C78 "0805-NP0-50 В-150 пФ +-1%" "CAP: 0805" 113.358,25.162 r0 top value="150 пФ"
C79 "1206-X7R-50 B-0,33 мкФ+-10%" "CAP: 1206" 83.595,30.001 r270 top value="0,33 мкФ"
C80 "1206-X7R-50 B-0,33 мкФ+-10%" "CAP: 1206" 83.595,35.001 r90 top value="0,33 мкФ"
C81 "1206-X7R-50 B-0,1 мкФ+-10%" "CAP: 1206" 222.995,83.65 r180 top value="0,1 мкФ"
C82 "1206-X7R-50 B-0,1 мкФ+-10%" "CAP: 1206" 211.395,84.55 r0 top value="0,1 мкФ"
C83 "0805-C0G-50 В-240 пФ +-5%" "CAP: 0805" 217.895,86.25 r180 top value="10 пФ"
C84 "1206-X7R-50 B-0,33 мкФ+-10%" "CAP: 1206" 123,36.347 r90 top value="0,33 мкФ"
C85 "1206-X7R-50 B-0,33 мкФ+-10%" "CAP: 1206" 129.135,29.5 r180 top value="0,33 мкФ"
C86 "1206-X7R-50 B-33 пФ+-10%" "CAP: 1206" 131,34.847 r270 top value="33 пФ"
C87 "0805-X5R-25 В-10 мкФ +-10%" "CAP: 0805" 215.395,71.25 r270 bottom value="10 мкФ"
C88 "1206-X7R-50 B-0,1 мкФ+-10%" "CAP: 1206" 213.768,78.397 r270 top value="0,1 мкФ"
C89 "1206-X7R-50 B-2,2 мкФ+-10%" "CAP: 1206" 220.46,70.9 r270 bottom value="2,2 мкФ"
C90 "1206-X7R-50 B-0,01 мкФ+-10%" "CAP: 1206" 216.731,71.3 r270 top value="0,01 мкФ"
C91 "1206-X7R-50 B-1 нФ+-10%" "CAP: 1206" 210.775,63.676 r270 top value="1 нФ"
C92 "1206-X7R-50 B-2,2 мкФ+-10%" "CAP: 1206" 217.731,70.75 r270 bottom value="2,2 мкФ"
C93 "1206-X7R-50 B-2,2 мкФ+-10%" "CAP: 1206" 213.229,63.676 r270 top value="2,2 мкФ"
C94 "1206-X7R-50 B-0,33 мкФ+-10%" "CAP: 1206" 211.9,70.55 r180 bottom value="0,33 мкФ"
C95 "TAJA106K010RNJ" "Tantal A" 150.9,28.083 r180 top value="10 мкФ"
C96 "1206-X7R-50 B-33 пФ+-10%" "CAP: 1206" 159.5,30.437 r0 top value="33 пФ"
C97 "1206-X7R-50 B-0,1 мкФ+-10%" "CAP: 1206" 151.75,25.5 r180 top value="0,1 мкФ"
C98 "1206-X7R-50 B-0,33 мкФ+-10%" "CAP: 1206" 158,38.437 r180 top value="0,33 мкФ"
C99 "1206-X7R-50 B-0,33 мкФ+-10%" "CAP: 1206" 154.34,34.206 r270 top value="0,33 мкФ"
DA1 "ADM2486BRWZ" 16-SOIC-W 91.574,70.579 r270 top
DA2 "ADM2486BRWZ" 16-SOIC-W 107.082,70.579 r270 top
DA3 "ADM2486BRWZ" 16-SOIC-W 122.6,70.5 r270 top
DA4 "ADM2486BRWZ" 16-SOIC-W 138.81,70.556 r270 top
DA5 "ADuM1100AR" 8-SOIC 55.394,54.455 r180 top
DA6 "ADuM1100AR" 8-SOIC 160.25,65.5 r90 top
DA7 "ADuM1100AR" 8-SOIC 59.25,26.25 r0 top
DA8 "ADM2486BRWZ" 16-SOIC-W 154.27,70.556 r270 top
DA9 "ADuM1100AR" 8-SOIC 59.25,18.75 r180 top
DA10 "ADuM1100AR" 8-SOIC 59.25,34 r180 top
DA11 "IL358D" 8-SOIC 103,103 r270 top
DA12 "AD8671AR" 8-SOIC 124.446,98.448 r90 top
DA13 "IL311D" 8-SOIC 134.446,94.448 r270 top
DA14 "IL311D" 8-SOIC 108.446,91.948 r270 top
DA15 "IL311D" 8-SOIC 114.446,91.948 r270 top
DA16 "AD8671AR" 8-SOIC 170,92.208 r0 top
DA17 "AD5443YRM" 10-MSOP 41.5,88 r0 top
DA18 "ADA4627-1ARZ" 8-SOIC 34.618,82.469 r0 top
DA19 "ADG433BR" 16-SOIC 41.5,43 r0 top
DA20 "ADA4627-1ARZ" 8-SOIC 41.5,95.11 r0 top locked
DA21 "ADA4627-1ARZ" 8-SOIC 53.308,88.5 r90 top
DA22 "AD8671AR" 8-SOIC 26.5,45.5 r180 top
DA23 "ADuM1100AR" 8-SOIC 170.168,65.15 r90 top
DA24 "ADM2486BRWZ" 16-SOIC-W 195.556,51.17 r180 top
DA25 "ADM2486BRWZ" 16-SOIC-W 195.286,36.53 r180 top
DA26 "ADM2486BRWZ" 16-SOIC-W 195.657,66.44 r180 top
DA27 "L78L06ACD13TR" 8-SOIC 183.25,101 r180 top
DA28 "ADR434BR" 8-SOIC 186.995,92.785 r0 top
DA29 "ADG433BR" 16-SOIC 106,31 r270 top
DA30 "ADA4627-1ARZ" 8-SOIC 87.595,33.501 r270 top
DA31 "AD8031ARZ" 8-SOIC 193.5,101.876 r180 top
DA32 "ADA4941-1YRZ" 8-SOIC 217.664,78.75 r270 top
DA33 "ADA4627-1ARZ" 8-SOIC 127,34.847 r270 top
DA34 "ADG432BR" 16-SOIC 140.197,32.438 r90 top
DA35 "AD7691BRM" 10-MSOP 212.5,71.296 r180 top
DA36 "AD5443YRM" 10-MSOP 150.5,33 r270 top
DA37 "ADA4627-1ARZ" 8-SOIC 159.225,34.253 r0 top
DD1 "IN74HC595AD" 16-SOIC 160.325,52.538 r90 top
DD2 "IN74HC00AD" 14-soic 107.112,80 r90 top
DD3 "IN74HC08AD" 14-SOIC 50.35,46.83 r0 top
KT1 "Lepestok" LEPESTOK7_750_224 212.5,19 r90 top
KT2 "Lepestok" LEPESTOK7_750_224 75,84.5 r90 top
KT3 "Lepestok" LEPESTOK7_750_224 195.75,82.25 r90 top
KT4 "Lepestok" LEPESTOK7_750_224 57.5,70 r90 top
KT5 "OTV10" OTV10 143.75,107.5 r0 top
KT6 "OTV10" OTV10 112.5,102.5 r0 top
KT7 "OTV10" OTV10 100.75,90.5 r0 top
KT8 "OTV10" OTV10 126.25,103.25 r0 top
KT9 "OTV10" OTV10 144.25,80.75 r0 top
KT10 "OTV10" OTV10 101.75,82.75 r0 top
KT11 "OTV10" OTV10 176.25,102 r90 top
KT12 "OTV10" OTV10 41.335,79.465 r90 top
KT13 "OTV10" OTV10 48,55.5 r0 top
KT14 "OTV10" OTV10 47,86.226 r90 top
KT15 "OTV10" OTV10 23,15 r90 top
KT16 "OTV10" OTV10 18,57.75 r90 top
KT17 "OTV10" OTV10 15.5,25 r90 top
KT18 "OTV10" OTV10 18,74.5 r90 top
KT19 "OTV10" OTV10 19.25,104 r90 top
KT20 "OTV10" OTV10 212.75,26.75 r0 top
KT21 "OTV10" OTV10 212.75,32.5 r0 top
KT22 "OTV10" OTV10 188.25,96.75 r0 top
KT23 "OTV10" OTV10 192.75,89 r0 top
KT24 "OTV10" OTV10 119.5,25 r0 top
KT25 "OTV10" OTV10 141.75,41.75 r0 top
KT26 "OTV10" OTV10 221.75,67 r0 top
KT27 "OTV10" OTV10 204.5,83.75 r0 top
KT28 "OTV10" OTV10 166.804,40.673 r0 top
R1 "1206-1 кОм+-5%" 1206 92,58.5 r180 top value="1 кОм"
R2 "1206-1 кОм+-5%" 1206 82,58.5 r0 top value="1 кОм"
R3 "1206-1 кОм+-5%" 1206 107.5,58.25 r180 top value="1 кОм"
R4 "1206-1 кОм+-5%" 1206 97.75,58.5 r0 top value="1 кОм"
R5 "1206-1 кОм+-5%" 1206 122.75,58.5 r180 top value="1 кОм"
R6 "1206-1 кОм+-5%" 1206 113,58.5 r0 top value="1 кОм"
R7 "1206-1 кОм+-5%" 1206 138.5,58.67 r180 top value="1 кОм"
R8 "1206-1 кОм+-5%" 1206 128.75,58.5 r0 top value="1 кОм"
R9 "1206-100 Ом+-5%" 1206 87,58.67 r0 top value="100 Ом"
R10 "1206-100 Ом+-5%" 1206 102.494,58.67 r0 top value="100 Ом"
R11 "1206-100 Ом+-5%" 1206 117.993,58.67 r0 top value="100 Ом"
R12 "1206-100 Ом+-5%" 1206 133.5,58.67 r0 top value="100 Ом"
R13 "1206-12 кОм+-5%" 1206 85.515,73.427 r180 top value="12 кОм"
R14 "1206-12 кОм+-5%" 1206 98.398,73.427 r0 top value="12 кОм"
R15 "1206-12 кОм+-5%" 1206 115.241,73.427 r0 top value="12 кОм"
R16 "1206-12 кОм+-5%" 1206 130.999,73.427 r0 top value="12 кОм"
R17 "1206-100 Ом+-5%" 1206 149.5,58.75 r0 top value="100 Ом"
R18 "1206-12 кОм+-5%" 1206 146.481,73.427 r180 top value="12 кОм"
R19 "1206-7,5 кОм+-5%" 1206 101.75,107.75 r0 top value="7,5 кОм"
R20 "1206-2,2 кОм+-5%" 1206 96.25,107.75 r180 top value="2,2 кОм"
R21 "1206-10 кОм+-0,5%" 1206 125.73,93.445 r180 top value="10 кОм"
R22 "1206-15 кОм+-5%" 1206 137.986,106.423 r270 top value="15 кОм"
R23 "1206-10 кОм+-0,5%" 1206 108.75,106 r270 top value="10 кОм"
R24 "1206-3 МОм+-5%" 1206 139.946,93.948 r180 top value="3 МОм"
R25 "1206-10 кОм+-0,5%" 1206 120.446,98.448 r90 top value="10 кОм"
R26 "1206-10 кОм+-0,5%" 1206 102.75,97.75 r0 top value="10 кОм"
R27 "1206-1,5 кОм+-5%" 1206 139.946,91.299 r0 top value="1,5 кОм"
R28 "1206-120 Ом+-5%" 1206 110.351,98.948 r270 top value="120 Ом"
R29 "1206-120 Ом+-5%" 1206 115.081,98.448 r270 top value="120 Ом"
R30 "1206-560 кОм+-5%" 1206 120.148,91.521 r270 top value="560 кОм"
R31 "1206-560 кОм+-5%" 1206 122.586,88.81 r90 top value="560 кОм"
R32 "1206-5,1 кОм+-5%" 1206 120.148,86.75 r270 top value="5,1 кОм"
R33 "1206-51 кОм+-5%" 1206 168.5,56 r270 top value="51 кОм"
R34 "1206-100 Ом+-5%" 1206 157.5,94.5 r180 top value="100 Ом"
R35 "1206-12 кОм+-5%" 1206 156.5,90.058 r270 top value="12 кОм"
R36 "1206-1,1 кОм+-5%" 1206 171.684,86.75 r270 top value="1,1 кОм"
R37 "1206-2,4 кОм+-5%" 1206 169.75,81.5 r90 top value="2,4 кОм"
R38 "1206-15 Ом+-5%" 1206 177.25,97.75 r90 top value="15 Ом"
R39 "1206-330 Ом+-5%" 1206 173.25,81.5 r270 top value="330 Ом"
R40 "1206-9,53 кОм+-1%" 1206 33.561,97.926 r225 top value="9,53 кОм"
R41 "1206-4,32 кОм+-1%" 1206 28,78.25 r0 top value="4,32 кОм"
R42 "1206-510 Ом+-5%" 1206 41.6,49.767 r0 top value="510 Ом"
R43 "1206-510 Ом+-5%" 1206 46.51,42.169 r90 top value="510 Ом"
R44 "1206-910 Ом+-5%" 1206 41.5,81.834 r180 top value="910 Ом"
R45 "1206-11 кОм+-5%" 1206 34.5,47 r270 top value="11 кОм"
R46 "1206-12 кОм+-1%" 1206 45.906,82.82 r270 top value="12 кОм"
R47 "1206-12 кОм+-5%" 1206 45.189,53.5 r90 top value="12 кОм"
R48 "1206-47 кОм+-5%" 1206 42.5,32.25 r180 top value="47 кОм"
R49 "1206-12 кОм+-1%" 1206 47,90.065 r90 top value="12 кОм"
R50 "1206-6,8 кОм+-5%" 1206 29.178,14.8 r0 top value="6,8 кОм"
R51 "1206-2,4 кОм+-5%" 1206 18,48.135 r270 top value="2,4 кОм"
R52 "1206-6,8 кОм+-5%" 1206 31.072,52.5 r90 top value="6,8 кОм"
R53 "1206-1,3 кОм+-5%" 1206 15.5,20 r0 top value="1,3 кОм"
R54 "1206-2,4 кОм+-5%" 1206 14.5,45 r270 top value="2,4 кОм"
R55 "1206-2,4 кОм+-5%" 1206 14.5,52 r270 top value="2,4 кОм"
R56 "1206-1,3 кОм+-5%" 1206 16.073,60.5 r0 top value="1,3 кОм"
R57 "1206-470 Ом+-5%" 1206 12.55,29.875 r270 top value="470 Ом"
R58 "1206-470 Ом+-5%" 1206 12.5,69 r90 top value="470 Ом"
R59 "2512-47 кОм+-5%" 2512 9,49 r270 top value="47 кОм"
R60 "1206-1,5 кОм+-5%" 1206 10,28.5 r90 top value="1,5 кОм"
R61 "1206-1,5 кОм+-5%" 1206 7.5,69 r90 top value="1,5 кОм"
R62 "1206-150 Ом+-5%" 1206 7.5,28.5 r90 top value="150 Ом"
R63 "1206-150 Ом+-5%" 1206 10,69 r90 top value="150 Ом"
R64 "2512-5,1 Ом+-5%" 2512 25.75,102 r45 top value="5,1 Ом"
R65 "1206-1 кОм+-5%" 1206 182.75,46 r270 top value="1 кОм"
R66 "1206-1 кОм+-5%" 1206 182.5,75.5 r270 top value="1 кОм"
R67 "1206-1 кОм+-5%" 1206 182.75,36 r270 top value="1 кОм"
R68 "1206-1 кОм+-5%" 1206 182.25,65.75 r270 top value="1 кОм"
R69 "1206-100 Ом+-5%" 1206 182.75,56.5 r270 top value="100 Ом"
R70 "1206-100 Ом+-5%" 1206 182.627,41.03 r270 top value="100 Ом"
R71 "1206-100 Ом+-5%" 1206 182.627,70.539 r270 top value="100 Ом"
R72 "1206-12 кОм+-5%" 1206 198.5,58 r90 top value="12 кОм"
R73 "1206-12 кОм+-5%" 1206 198.5,46 r270 top value="12 кОм"
R74 "1206-12 кОм+-5%" 1206 198.025,72.275 r90 top value="12 кОм"
R75 "1206-240 Ом+-5%" 1206 141,87.396 r0 top locked value="240 Ом"
R76 "С2-29В-2-2 МОм +-0.5%-1,0-А" C2-29-2 164.5,-25 r180 top
R77 "С2-29В-2-2 МОм +-0.5%-1,0-А" C2-29-2 164.5,18 r180 top
R78 "С2-29В-2-2 МОм +-0.5%-1,0-А" C2-29-2 159,13.5 r270 top
R79 "С2-29В-2-2 МОм +-0.5%-1,0-А" C2-29-2 124,-25 r180 top
R80 "С2-29В-2-2 МОм +-0.5%-1,0-А" C2-29-2 124,18 r180 top
R81 "1206-1 МОм+-5%" 1206 92.126,32.001 r90 top value="1 МОм"
R82 "1206-2 МОм+-0,1%" 1206 113.858,32.546 r0 top value="2 МОм"
R83 "1206-40,2 кОм+-0,1%" 1206 113.858,29.592 r0 top value="40,2 кОм"
R84 "1206-24,9 кОм+-0,5%" 1206 220,89.323 r0 top value="24,9 кОм"
R85 "1206-24,9 кОм+-0,5%" 1206 214.795,89.323 r180 top value="24,9 кОм"
R86 "1206-2,2 Ом+-5%" 1206 193.5,94.845 r0 top value="2,2 кОм"
R87 "1206-30 кОм+-0.1%" 1206 222.895,86.25 r0 top value="30 кОм"
R88 "1206-11,8 кОм+-0,1%" 1206 211.395,86.85 r0 top value="11,8 кОм"
R89 "1206-4,99 кОм+-0,1%" 1206 121.5,32.802 r0 top value="4,99 кОм"
R90 "1206-20 кОм+-0,1%" 1206 221.663,79.43 r90 top value="20 кОм"
R91 "1206-8,2 кОм+-5%" 1206 133.5,34.847 r270 top value="8,2 кОм"
R92 "1206-14 кОм+-0,1%" 1206 217.895,83.75 r180 top value="14 кОм"
R93 "1206-20 кОм+-0,1%" 1206 99.5,31.5 r270 top value="20 кОм"
R94 "1206-4,99 кОм+-0,1%" 1206 97.05,27 r90 top value="4,99 кОм"
R95 "1206-510 Ом+-5%" 1206 219,71.35 r270 top value="510 Ом"
R96 "0805-32 кОм+-0,1%" 0805 140.25,39.75 r0 top
R97 "0805-6,04 кОм+-0,1%" 0805 146.75,31.5 r270 top value="6,04 кОм"
R98 "0805-2 кОм+-0,1%" 0805 146.75,35.75 r270 top value="2 кОм"
R99 "1206-510 Ом+-5%" 1206 211.395,82.224 r180 top value="510 Ом"
R100 "1206-22 Ом+-5%" 1206 215.883,63.676 r90 top value="22 Ом"
R101 "1206-24 Ом+-5%" 1206 212,67.25 r180 top value="24 Ом"
R102 "1206-33 Ом+-5%" 1206 206.395,70.296 r180 top value="33 Ом"
R103 "1206-33 Ом+-5%" 1206 206.395,72.75 r180 top value="33 Ом"
R104 "1206-33 Ом+-5%" 1206 206.395,75.25 r180 top value="33 Ом"
RP1 "3329H-1-222LF" 3329H 92,104.54 r180 top
RP2 "3329H-1-472LF" 3329H 34.5,69.5 r0 top
RP3 "3329H-1-472LF" 3329H 44.64,76.046 r180 top
RP4 "3329H-1-223LF" 3329H 38.34,32.96 r90 top
VD1 "1N4148WS" SOD-323F 136.446,102.448 r180 top
VD2 "1N4148WS" SOD-323F 136.446,99.948 r0 top
VD3 "1N4148WS" SOD-323F 161.5,88.058 r270 top
VD4 "1N4148WS" SOD-323F 164.494,88.126 r90 top
VD5 "1N4148WS" SOD-323F 171,96.5 r180 top
VD6 "1N4148WS" SOD-323F 171,99.058 r0 top
VD7 "BZX55-C10" DO-35 167,84.845 r270 top
VD8 "1N4001WS" SOD-323 179.079,84.7 r90 top
VD9 "1N4001WS" SOD-323 176,84.767 r270 top
VD10 "BZX55-C5V6" DO-35 53.308,93.756 r180 top
VD11 "BZX55-C5V6" DO-35 56,83.5 r0 top
VD12 "BZX55-C6V2" DO-35 37.2,17.487 r0 top
VD13 "BZX55-C6V2" DO-35 37.5,59.5 r180 top
VD14 "1N4148WS" SOD-323F 5.5,48.5 r270 top
VD15 "1N4148WS" SOD-323F 27.5,6 r270 top
VD16 "1N4148WS" SOD-323F 13.955,91.777 r270 top
VD17 "1N4148WS" SOD-323F 22.5,5.75 r270 top
VD18 "1N4148WS" SOD-323F 16.338,91.777 r270 top
VD19 "1N4001WS" SOD-323 25,6 r90 top
VD20 "1N4001WS" SOD-323 18.955,91.777 r90 top
VD21 "1N4148WS" SOD-323F 140.72,82.5 r180 top
VD22 "1N4148WS" SOD-323F 140.72,84.986 r0 top
VD23 "1N4148WS" SOD-323F 97,35.5 r90 top
VD24 "1N4148WS" SOD-323F 94.5,35.5 r270 top
VD25 "BZX55-C5V6" DO-35 131.5,27 r180 top
VD26 "BZX55-C5V6" DO-35 126.69,40.347 r0 top
VT1 "FZT658" SOT-23-4 33.5,14.8 r180 top
VT2 "FZT758" SOT-23-4 33.5,56.3 r180 top
VT3 "FZT758" SOT-23-4 31.3,23.5 r90 top
VT4 "FZT658" SOT-23-4 31.3,64 r90 top
VT5 "MJE5730" TO-220(F) 22,29 r180 top
VT6 "TIP48" TO-220(F) 22,69.5 r180 top
VT7 "TIP48" TO-220(F) 4,36 r90 top
VT8 "MJE5730" TO-220(F) 4,62 r90 top
VT9 "MJE5730" TO-220(F) 4,21.5 r90 top
VT10 "TIP48" TO-220(F) 3.832,76.463 r90 top
XP1 "BH2-20" DS1014-20S 65,72.5 r270 top
XP2 "280371-2" 280371-2 120.54,107 r180 top
XP3 "DS1021-1x3" DS1021-1x3S 44.056,65.51 r180 top
XP4 "280372-2" 280372-2 80.08,105.5 r180 top
XP5 "BH2-20" DS1014-20S 184.5,23.5 r0 top
XP6 "280373-2" 280373-2 225.209,16.327 r90 top

## Footprints (in the part's own frame and the unit in brackets; to place one, negate y for a bottom-side part, rotate by r counter-clockwise, add the part's x,y. Pads: shape width x height; smd on the part's side, far side on the other; paste and mask are expansions set on the pad)
8-SOIC [mm] "Body 3.9mmx4.9mm 1.27 pitch"
  rect 1.525x0.65 smd: 1(-2.712,1.905)
  oval 1.525x0.65 smd: 2(-2.712,0.635) 3(-2.712,-0.635) 4(-2.712,-1.905) 5(2.712,-1.905) 6(2.712,-0.635) 7(2.712,0.635) 8(2.712,1.905)
  silkscreen extent -1.6,-2.45 1.6,2.45, body extent -3,-2.45 3,2.45, height 1.75
10-MSOP [mm] "3x3 mm, pitch 0.5 mm"
  rect 1.45x0.3 smd: 1(-2.225,1) 2(-2.225,0.5) 3(-2.225,0) 4(-2.225,-0.5) 5(-2.225,-1) 6(2.225,-1) 7(2.225,-0.5) 8(2.225,0) 9(2.225,0.5) 10(2.225,1)
  silkscreen extent -1.15,-1.5 1.15,1.5, body extent -2.45,-1.5 2.45,1.5, height 0.95
14-soic [mm] "Body 8.6x3.9mm, pitch 1.27 mm"
  rect 1.6x0.6 smd: 1(0,0)
  rrect100% 1.6x0.6 smd: 2(0,-1.27) 3(0,-2.54) 4(0,-3.81) 5(0,-5.08) 6(0,-6.35) 7(0,-7.62) 8(5.9,-7.62) 9(5.9,-6.35) 10(5.9,-5.08) 11(5.9,-3.81) 12(5.9,-2.54) 13(5.9,-1.27) 14(5.9,0)
  round 0.5 on Mech13: ""(0.5,0)
  silkscreen extent 1.2,-8.05 4.7,0.45, body extent -0.12,-8.15 6.02,0.55, height 1.78
14-SOIC [mm] "Body 8.6x3.9mm, pitch 1.27 mm"
  rect 1.6x0.6 smd: 1(0,0)
  rrect100% 1.6x0.6 smd: 2(0,-1.27) 3(0,-2.54) 4(0,-3.81) 5(0,-5.08) 6(0,-6.35) 7(0,-7.62) 8(5.9,-7.62) 9(5.9,-6.35) 10(5.9,-5.08) 11(5.9,-3.81) 12(5.9,-2.54) 13(5.9,-1.27) 14(5.9,0)
  round 0.5 on Mech13: ""(0.5,0)
  silkscreen extent 1.2,-8.05 4.7,0.45, body extent -0.12,-8.15 6.02,0.55, height 1.78
16-SOIC [mm] "Body 3.9mm×9.9mm 1.27 pitch"
  rect 1.525x0.65 smd: 1(-2.712,4.445)
  oval 1.525x0.65 smd: 2(-2.712,3.175) 3(-2.712,1.905) 4(-2.712,0.635) 5(-2.712,-0.635) 6(-2.712,-1.905) 7(-2.712,-3.175) 8(-2.712,-4.445) 9(2.712,-4.445) 10(2.712,-3.175) 11(2.712,-1.905) 12(2.712,-0.635) 13(2.712,0.635) 14(2.712,1.905) 15(2.712,3.175) 16(2.712,4.445)
  silkscreen extent -1.6,-4.95 1.6,4.95, body extent -3,-4.95 3,4.95, height 1.75
16-SOIC-W [mm] "RW-16, 16-SOIC WIDE, 1,27 pitch"
  rect 2.298x0.582 smd paste+0: 1(0,0)
  rrect100% 2.298x0.582 smd paste+0: 2(0,-1.27) 3(0,-2.54) 4(0,-3.81) 5(0,-5.08) 6(0,-6.35) 7(0,-7.62) 8(0,-8.89) 9(9.056,-8.89) 10(9.056,-7.62) 11(9.056,-6.35) 12(9.056,-5.08) 13(9.056,-3.81) 14(9.056,-2.54) 15(9.056,-1.27) 16(9.056,0)
  silkscreen extent 1.65,-9.59 7.41,0.7, body extent -1.4,-9.84 10.45,0.95, height 0.25
0805 [mm] "Resistor SMD"
  rect 1x1.25 smd: 1(-1,0) 2(1,0)
  silkscreen extent -1.7,-0.82 1.7,0.82, body extent -1,-0.6 1,0.6, height 0.44
1206 [mm] "Resistor SMD"
  rect 1x1.6 smd: 1(-1.5,0) 2(1.5,0)
  silkscreen extent -2.2,-1 2.2,1, body extent -1.65,-0.8 1.55,0.8, height 0.47
2512 [mm] "Resistor SMD"
  rect 1x3.3 smd: 1(-3.1,0) 2(3.1,0)
  silkscreen extent -3.8,-1.85 3.8,1.85, body extent -3.18,-1.6 3.18,1.6, height 0.52
3329H [mm]
  rect 1.12x1.12 hole 0.7: 1(0,0)
  round 1.12 hole 0.7: 2(0,2.54) 3(2.54,2.54)
  silkscreen extent -3.4,-1.5 3.4,5.94, body extent -2.98,-0.87 3.37,5.48, height 5.07
280371-2 [mm] "AMPMODU 2"
  rect 1.65x1.65 hole 1.1: 1(0,0)
  round 1.65 hole 1.1: 2(2.54,0) 3(5.08,0) 4(7.62,0)
  silkscreen extent -2.54,-2.4 10.16,2.6, body extent -2.41,-2.4 10.03,2.6, height 12.6
280372-2 [mm] "AMPMODU 2"
  rect 1.65x1.65 hole 1.1: 1(0,0)
  round 1.65 hole 1.1: 2(2.54,0) 3(5.08,0) 4(7.62,0) 5(10.16,0) 6(12.7,0)
  silkscreen extent -2.55,-2.4 15.25,2.6, body extent -2.41,-2.26 15.11,2.74, height 12.6
280373-2 [mm] "AMPMODU 2"
  rect 1.65x1.65 hole 1.1: 1(0,0)
  round 1.65 hole 1.1: 2(2.54,0) 3(5.08,0) 4(7.62,0) 5(10.16,0) 6(12.7,0) 7(15.24,0) 8(17.78,0)
  silkscreen extent -2.56,-2.4 20.34,2.6, body extent -2.35,-2.06 20.25,2.94, height 12.6
C2-29-2 [mm] "навесной"
  silkscreen extent 6.1,0 38.31,9.8, body extent 0.55,0.02 43.55,9.82, height 9.88
"CAP TH ALUM ELEC D5.00mm S2.00mm H11.00mm" [mm] "5mm Diameter 2mm Lead Spacing Aluminum Electrolytic Capacitors Radial, Can"
  oval 1.3x1.95 hole 0.7: 1(1,0) 2(-1,0)
  silkscreen extent -2.5,-2.5 2.5,2.5, body extent -2.51,-2.5 2.5,2.5, height 11
"CAP: 0805" [mm]
  rect 1x1.25 smd: 1(-1,0) 2(1,0)
  silkscreen extent -1.7,-0.83 1.7,0.83, body extent -1,-0.62 1,0.63, height 0.78
"CAP: 1206" [mm]
  rect 1x1.6 smd: 1(-1.5,0) 2(1.5,0)
  silkscreen extent -2.2,-1 2.2,1, body extent -1.6,-0.8 1.6,0.8, height 1
CC45S [mm] "навесной"
  silkscreen extent -7.75,-2.47 7.75,2.53, body extent -7.7,-3 7.7,3, height 13.3
DO-35 [mm]
  rect 1.2x1.2 hole 0.7 paste-2539.97 mask+0: 1(-3.813,0)
  round 1.2 hole 0.7 paste-2539.97 mask+0: 2(3.813,0)
  silkscreen extent -2.68,-0.95 2.68,0.95, body extent -4.51,-1.06 4.51,1.06, height 0.25
DS1014-20S [mm] "BH2-20 pitch 2mm, 2x20"
  rect 1.3x1.3 hole 0.8: 1(0,0)
  round 1.3 hole 0.8: 2(0,2) 3(2,0) 4(2,2) 5(4,0) 6(4,2) 7(6,0) 8(6,2) 9(8,0) 10(8,2) 11(10,0) 12(10,2) 13(12,0) 14(12,2) 15(14,0) 16(14,2) 17(16,0) 18(16,2) 19(18,0) 20(18,2)
  silkscreen extent -4.55,-2.4 22.55,3.7, body extent -4.75,-1.7 22.75,3.7, height 5.6
DS1021-1x3S [mm]
  rect 1.65x1.65 hole 1.1: 1(0,0)
  round 1.65 hole 1.1: 2(-2.54,0) 3(-5.08,0)
  silkscreen extent -6.6,-1.44 1.52,1.44, body extent -6.35,-1.25 1.27,1.25, height 5.75
LEPESTOK7_750_224 [mm]
  round 1.6 hole 0.9: 1(0,0)
  silkscreen extent -1,-1 1,1
OTV10 [mm]
  round 1.5 hole 1: 1(0,0)
SOD-323 [mm]
  rect 1.085x0.55 smd: 1(-1.14,0) 2(1.14,0)
  silkscreen extent -1.68,-0.64 0.83,0.64, body extent -1.25,-0.63 1.25,0.63, height 1.15
SOD-323F [mm]
  rect 1.05x0.6 smd paste+0 mask+0.102: 1(-1.4,0) 2(1.4,0)
  silkscreen extent -0.85,-0.63 0.85,0.69, body extent -1.6,-0.72 1.6,0.72, height 0.25
SOT-23-4 [mm]
  rect 1.8x0.9 smd: 1(0,0) 2(0,2.3) 3(0,4.6)
  rect 1.8x3.2 smd: 4(-6,2.3)
  silkscreen extent -4.75,-0.95 0.9,5.55, body extent -6.5,-0.95 0.5,5.55, height 1.65
"Tantal A" [mm]
  rect 1.4x1.8 smd paste+0 mask+0: 1(-1.3,0) 2(1.3,0)
  silkscreen extent -0.23,-0.9 0.22,0.9, body extent -2.1,-1 2.1,1, height 0.25
TO-220(F) [mm] "TO-220 переформованный"
  round 2 hole 1.2: 1(-2.5,0) 2(0,-2.5) 3(2.5,0)
  silkscreen extent -5.15,-1.95 5.25,2.8, body extent -5,-2.8 5.2,2.7, height 23.06
TZC3 [mm]
  rect 1.4x0.8 smd: 1(-2.1,0) 2(2.1,0)
  silkscreen extent -2.8,-1.6 2.25,1.6, body extent -2.25,-1.6 2.25,1.6, height 1.7
К73-17-A15 [mm]
  round 1.5 hole 1: 1(0,0) 2(15,0)
  silkscreen extent 1,-0.5 14,0.5
"Крышка 745512.799" [mm] "УШЯИ 745512.799"
  body extent 0.1,-0.1 106.6,86.4, height 10
"Радиатор 752699.062" [mm] "Радиатор 752699.062"
  round 3 hole 3 unplated: 1(0,0) 1(0,80)
  body extent -9,-5 3,85, height 50
"Стойка 301421.021" [mm] "ФТ-4 Стойка УШЯИ.301421.021"
  round 3 hole 3 unplated mask-10: 1(0,0)
  body extent -2.26,-2.24 2.26,2.24, height 8.5
"Стойка 745512.303" [mm] "Стойка УШЯИ.745512.303"
  round 2.9 hole 1.8: 2(-7.5,-2.5) 2(0,5) 2(7.5,-2.5)
  body extent -7.75,-3 7.75,5.3, height 25
Экран1 [mm] "УШЯИ 745418.110"
  round 3 hole 1.5 mask-10: 1(0,42.7) 1(23.9,84.9) 1(32.4,0.5) 1(63.9,84.9) 1(72.4,0.4) 1(104.6,42.7)
  body extent -0.1,0.2 104.9,85.2, height 22

## Part data
C64 C65 C66 C68 C69: "CC45 series"
C74: "Подстроечный конденсатор  5-20пФ, 100В"
C95: "Cap Tant Solid 10uF 10V A CASE 10%", Tolerance=20%, Voltage=16V
DA1 DA2 DA3 DA4 DA8 DA24 DA25 DA26: "Isolated RS-485 Transceiver,  20 Mbps data rate, SOIC-16-W"
DA5 DA6 DA7 DA9 DA10 DA23: "iCoupler Digital Isolator"
DA11: "Ultraprecision, 36 V, 2.8 nV/√Hz / Dual Rail-to-Rail Output Op Amp"
DA12 DA16 DA22: "Bias Current Operational Amplifiers, Precision, Very Low Noise, Low Input"
DA13 DA14 DA15: "High Perfomance Voltage Comparartor"
DA17 DA36: "12-Bit High Bandwidth / Multiplying DACs with Serial Interface 10-MSOP"
DA18 DA20 DA21: library part AD8671AR, "Bias Current Operational Amplifiers, Precision, Very Low Noise, Low Input"
DA19 DA29 DA34: "LC2MOS Precision Quad SPST Switches"
DA30 DA33 DA37: "30 V, High Speed, Low Noise, Low Bias / Current, JFET Operational Amplifier"
DA31: "Rail-to-Rail I/O Amplifiers 2.7 V, 800 μA, 80 MHz"
DA32: "Single-Supply, Differential, 18-Bit ADC Driver"
DD1: "8-Bit SIPO Register w/ Latch & 3-State"
DD2: "Quad 2-Input NAND Gate High-Performance Silicon-Gate CMOS."
DD3: "Quad 2-Input AND Gate High-Performance Silicon-Gate CMOS"
R76 R77 R78 R79 R80: "Резисторы постоянные непроволочные прецизионные С2-29В, производитель \"АО\"НПО\"ЭРКОН\"\"АО\"НПО\"ЭРКОН\"", Диапазон значений номинальных сопротивлений="от 1 Ом до 8,56 МОм", Категории качества=ВП, Номинальная мощность рассеяния="1 Вт", Ряд сопротивлений=Е192, ТУ="ОЖО.467.099 ТУ"
RP1: "Variable Resistor 2.2kOm"
RP2 RP3: "Variable Resistor 4.7kOm"
RP4: "Variable Resistor 22kOm"
VD1 VD2 VD3 VD4 VD5 VD6 VD14 VD15 VD16 VD17 VD18 VD21 VD22 VD23 VD24: "Small Signal Fast Switching Diod"
VD7: "Стабилитрон BZX55-C10"
VD8 VD9 VD19 VD20: "General Purpose Plastic Rectifier"
VD10 VD11 VD25 VD26: "Стабилитрон BZX55-C5V6"
VD12 VD13: "Стабилитрон BZX55-C6V2"
VT5 VT8 VT9: "N-Channel 300V 1A 50W"
VT6 VT7 VT10: "NPN SWITCHING TRANSISTOR"
XP1 XP5: "pitch 2mm, 20 pin 2x10"
XP2 XP4 XP6: "Connector"
R1 R2 R3 R4 R5 R6 R7 R8 R9 R10 R11 R12 R13 R14 R15 R16 R17 R18 R19 R20 R21 R22 R23 R24 R25 R26 R27 R28 R29 R30 R31 R32 R33 R34 R35 R36 R37 R38 R39 R40 R41 R42 R43 R44 R45 R46 R47 R48 R49 R50 R51 R52 R53 R54 R55 R56 R57 R58 R60 R61 R62 R63 R65 R66 R67 R68 R69 R70 R71 R72 R73 R74 R75 R81 R82 R83 R84 R85 R86 R87 R88 R89 R90 R91 R92 R93 R94 R95 R99 R100 R101 R102 R103 R104: ModelPrint=1206
R59 R64: ModelPrint=2512
R97 R98: ModelPrint=0805

## Free pads (board coordinates)
  round 2.2 hole 2.2 unplated: 2(79.5,19.75)
  round 1 smd mask+0.5: R1(2.5,2.5) R1(2.5,100.25) R1(2.5,108.305) R1(8.75,108.305) R1(44,-36.75) R1(44.037,-26.877) R1(50.25,-36.75) R1(179.75,-36.75) R1(185.963,-26.877) R1(186,-36.75) R1(220,1.681) R1(220,108.25) R1(227.502,1.681) R1(227.502,9.681) R1(227.502,100.25) R1(227.502,108.25)

## Via types
v1: diameter 0.6, hole 0.3, Top Layer to Bottom Layer, 241 vias
v2: diameter 0.5, hole 0.3, Top Layer to Bottom Layer, 3 vias
v3: diameter 1.1, hole 0.8, Top Layer to Bottom Layer, 1 vias
v4: diameter 1.6, hole 0.9, Top Layer to Bottom Layer, 1 vias

## Nets (pads, with @x,y where several pads share a name; then routed paths per layer and width w, separated by ;. In a path a pad name is that pad's centre, name@x,y a point inside that pad or via, vN(x,y) a via of type N, cw(c..) or ccw(c..) an arc to the next point about the centre after c; other vN are vias at no path point)
0V: C31.2 DA28.4 DA36.2 DA37.3 KT11.1 R36.2 R38.2 R39.1 R81.1 R87.2 R88.1 R93.2 R94.2 R98.1 R100.1 VD5.1 VD6.2 VD8.2 VD9.1 VD23.1 VD24.2 | length 303.1
  Top Layer w0.3: 151,33.838 DA36.2@151,35.225
  Top Layer w0.5: R81.1@92.126,30.501 92.176,30.501 92.426,30.251 92.426,26.987 v1(93.54,25.873) ; R81.1@92.217,30.379 94.553,30.379 94.595,30.337 97.095,30.337 97.095,30.081 ; v1(94.5,33.25) 94.5,34.5 VD23.1@96.946,34.5 ; R94.2@97.05,28.5 97.125,28.575 97.125,30.052 ; 97.264,30.169 97.433,30.337 99.162,30.337 R93.2@99.5,30 ; v1(97.267,22.146) 146.104,22.146 v1(146.25,22) ; v1(146.355,25.083) 146.355,27.105 147.875,28.625 147.875,29.462 148.25,29.837 148.25,33.75 ; R98.1@146.75,36.75 148.322,36.75 ; 148.25,34.588 148.25,33.75 ; 148.322,34.588 148.322,36.75 ; 148.492,38.758 157.56,47.825 160.758,47.825 160.883,47.7 164.081,47.7 164.187,47.806 165.056,47.806 v1(165.075,47.825) ; 148.5,38.75 148.322,38.572 148.322,36.75 ; DA37.3@156.513,33.618 155.969,33.618 155.748,33.838 151,33.838 148.338,33.838 148.25,33.75 ; R36.2@171.684,85.25 174.151,85.25 ; VD5.1@172,96.554 172,99.058 174.808,99.058 175,99.25 ; R39.1@173.25,83 173.55,83 173.8,83.25 173.8,84.899 174.151,85.25 ; v1(174.75,57.5) 175.75,58.5 175.75,77.75 177.822,79.822 178.236,79.822 178.271,79.787 179.886,79.787 180.816,80.718 180.816,81.069 181.747,82 186.75,82 189,84.25 189,86.3 ; 174.813,99.25 174.813,100.563 KT11.1@176.25,102 ; 175,99.154 177.154,99.154 R38.2@177.25,99.25 177.5,99 178,99 179.025,97.975 179.025,88.225 179.079,88.171 VD8.2@179.079,85.84 ; VD8.2@179.079,85.75 174.651,85.75 174.151,85.25 ; 179.249,88.342 181.141,86.45 181.586,86.45 C31.2@181.836,86.2 ; C31.2@182.386,86.3 189,86.3 ; 184.25,86.5 184.283,86.533 DA28.4@184.283,90.88 ; R100.1@215.883,62.176 216.183,62.176 217.508,63.5 224,63.5 225.75,65.25 225.75,85.457 225.457,85.75 224.645,85.75 224.395,86 R87.2@224.395,86.25 224.395,89.105 222.25,91.25 212.927,91.25 209.895,88.219 R88.1@209.895,86.85 209.895,86.55 209.645,86.3 189,86.3
  Bottom Layer w0.5: v1(93.54,25.873) v1(97.267,22.146) ; v1(94.5,30.5) v1(94.5,33.25) ; v1(146.25,22) 146.25,24.951 146.355,25.056 v1(146.355,25.083) ; v1(165.075,47.825) v1(174.75,57.5)